# EAGLE board Programmer v0.1 (EAGLE 7.5.0)
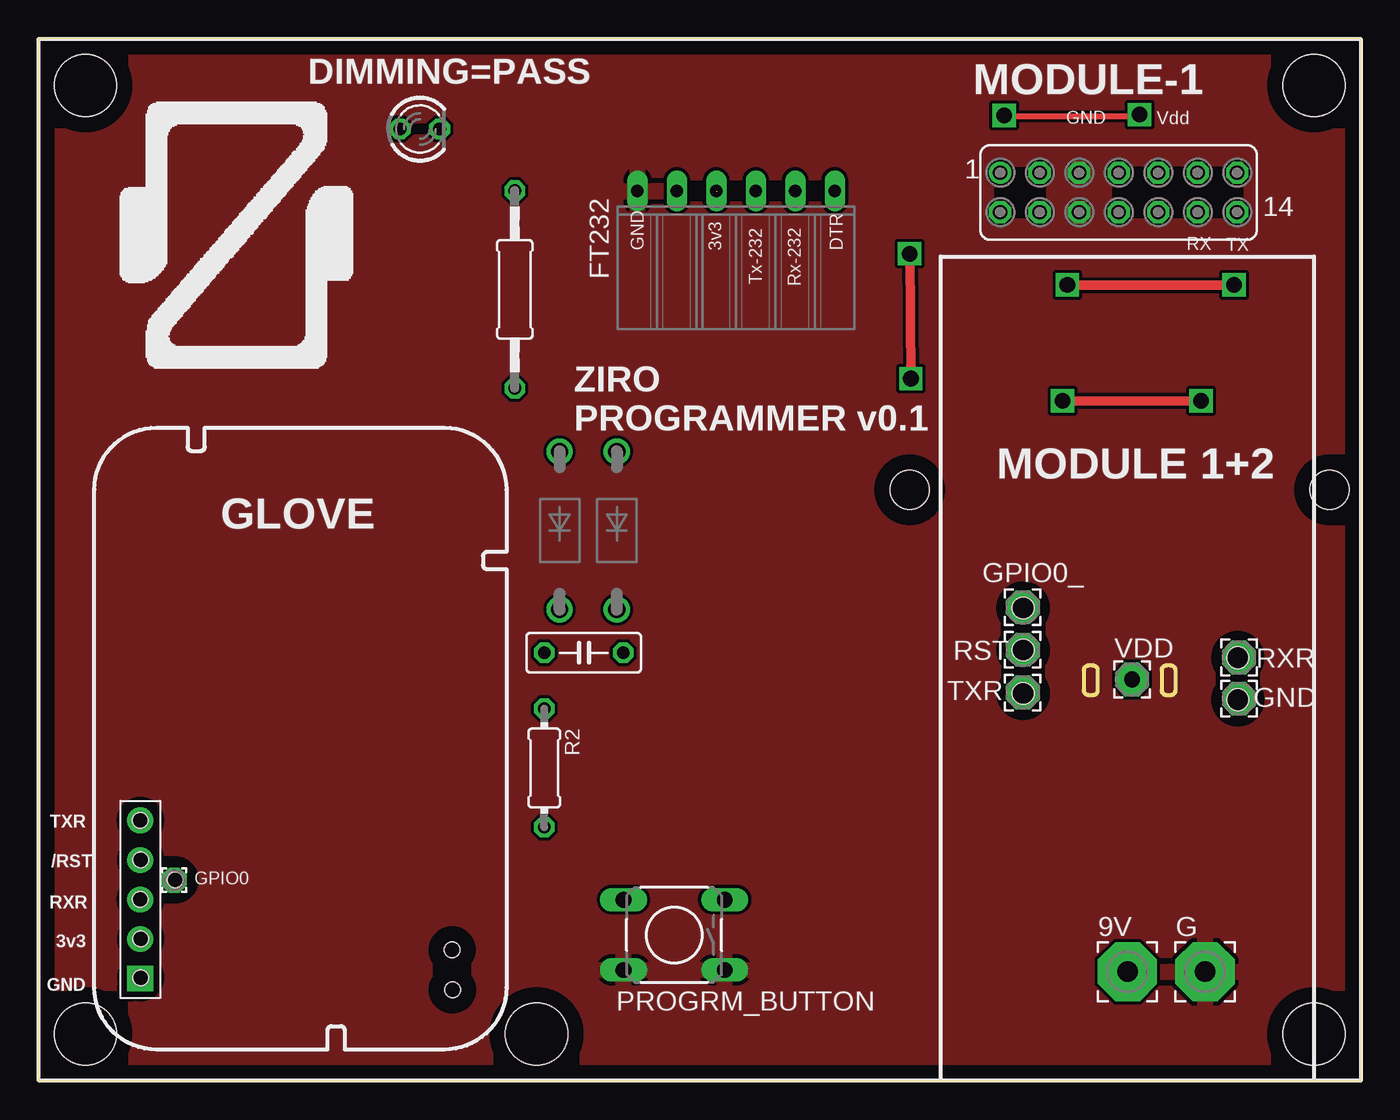
[diagram p0: board, top side]
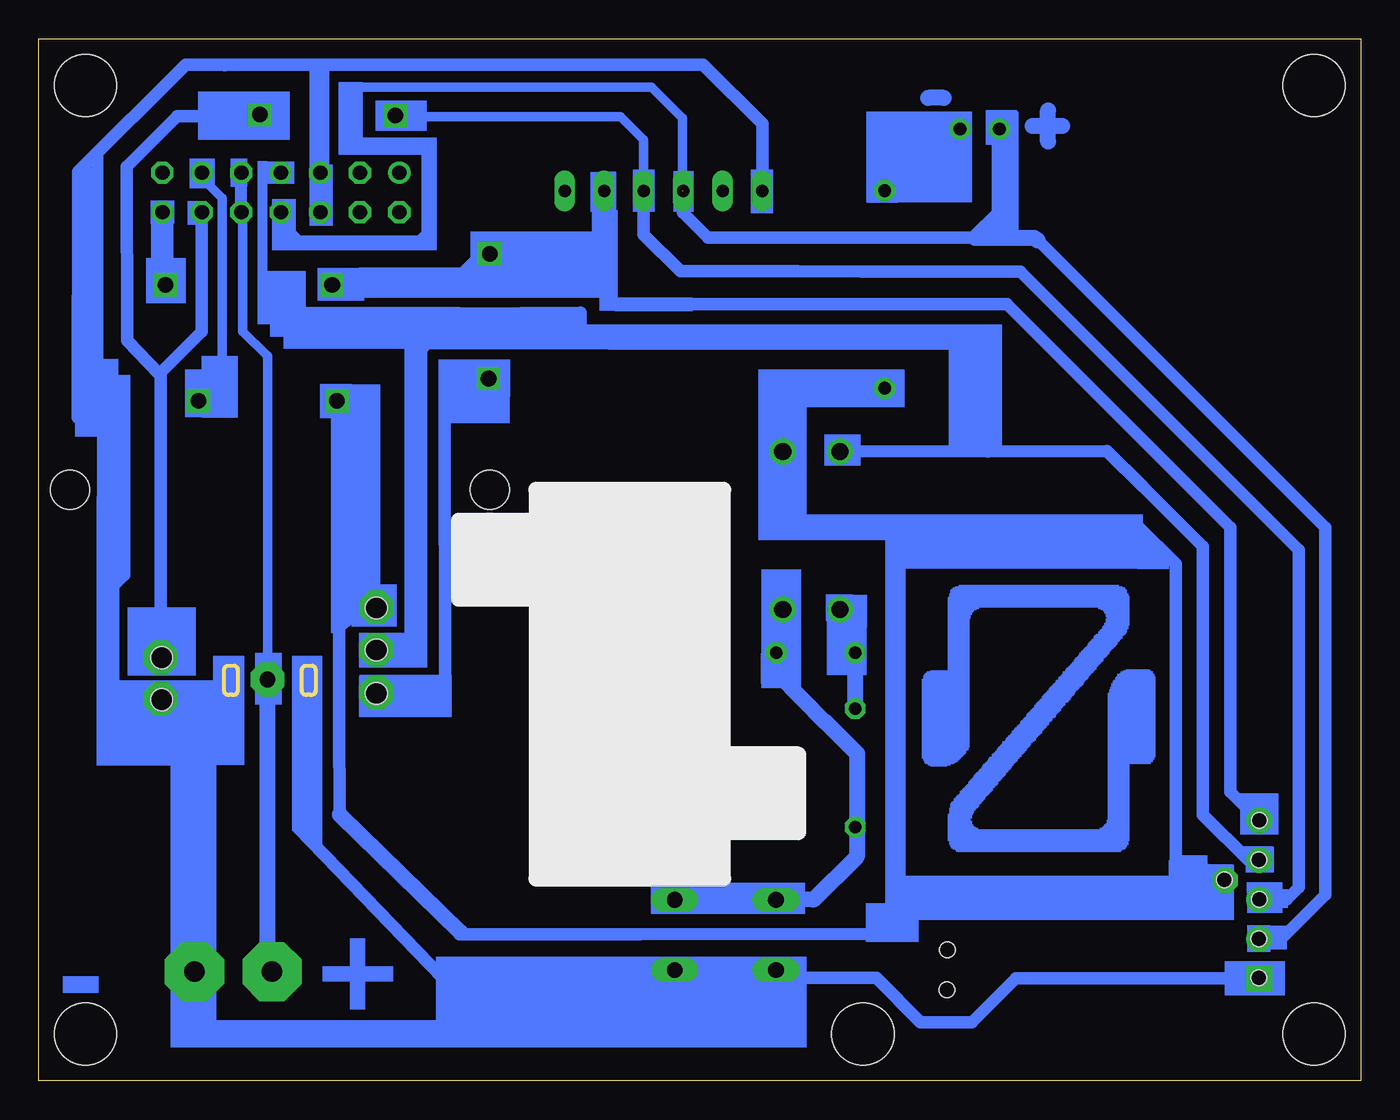
[diagram p1: board, bottom side, seen from below]

Size 85 x 67 mm. Coordinates in mm from the lower left corner, seen from the top.
Outline: 0,0 85,0 85,67 0,67 0,0
Copper layers (1*16): Top 0.035mm / dielectric 1.5mm / Bottom 0.035mm
Design rules "default": minimum track width 10mil, minimum drill 24mil, track to track 8mil, track to pad 8mil, pad to pad 8mil, via to via 8mil, smd to smd 8mil, copper to edge 40mil, drill to drill 8mil, minimum pad ring 10mil, minimum via ring 8mil, stop-mask expansion 4mil, vias tented up to drill 0mil, thermal gap 10mil
Holes 4 mm at 3,64 82,3 3,3 82,64 32,3
Holes 1 mm at 8.76,12.91 6.56,14.21 6.53,11.66 6.55,9.12 6.53,16.74 6.55,6.6 26.57,8.41 26.59,5.84
Holes 2.5 mm at 56,38 83,38
Holes 1.4 mm at 77.1,27.2 77.1,24.5 63.3,24.9 63.3,27.7 63.3,30.4
Milling: area 67.2,24.8 to 68.1,26.7; area 72.2,24.8 to 73.1,26.7

## Footprints (pad centres in the part's own frame; a part is rotated, then mirrored left to right if it is on the bottom)
3,81/1,3 = drill 1.321 pad 3.81 octagon: 1 0,0
C050-025X075 = drill 0.813 octagon: 1 -2.54,0; 2 2.54,0
DO41-10 = drill 1.118: A 5.08,0; C -5.08,0
FE06W = drill 0.813 long: 1 -6.35,0; 2 -3.81,0; 3 -1.27,0; 4 1.27,0; 5 3.81,0; 6 6.35,0
H5-2.54 = drill 0.889 pad 1.651 square: 1 0,5.08 | drill 0.889 pad 1.651: 2 0,2.54; 3 0,0; 4 0,-2.54; 5 0,-5.08
2,15/1,0 = drill 1.016 pad 2.159 octagon: 1 0,0
1,6/0,8 = drill 0.813 pad 1.6 octagon: 1 0,0
LED3MM = drill 0.813 octagon: A -1.27,0; K 1.27,0
TAC-SWITCH-PTH = drill 1.016 pad 1.524 long: 1 -3.251,2.261; 2 3.251,2.261; 3 -3.251,-2.261; 4 3.251,-2.261
0207/12 = drill 0.813 octagon: 1 -6.35,0; 2 6.35,0
0204/7 = drill 0.813 octagon: 1 -3.81,0; 2 3.81,0
FE07-2 = drill 0.914: 1 -7.62,1.27 | drill 0.914 octagon: 2 -7.62,-1.27; 3 -5.08,1.27; 4 -5.08,-1.27; 5 -2.54,1.27; 6 -2.54,-1.27; 7 0,1.27; 8 0,-1.27; 9 2.54,1.27; 10 2.54,-1.27; 11 5.08,1.27; 12 5.08,-1.27; 13 7.62,1.27; 14 7.62,-1.27

## Placement (x,y rotation side)
9V  WIREPAD3,81/1,3  [3,81/1,3]  70,7 0 top
C1  0.1uF  [C050-025X075]  35.04,27.52 0 top
D1  1N4004  [DO41-10]  33.49,35.38 90 top
D2  1N4004  [DO41-10]  37.17,35.38 90 top
FT232  [FE06W]  44.84,57.22 180 top
G  WIREPAD3,81/1,3  [3,81/1,3]  75,7 0 top
GL  5p-2.54  [H5-2.54]  6.52,11.65 180 top
GND  [2,15/1,0]  77.18,24.56 0 top
GPIO0  WIREPAD1,6/0,8  [1,6/0,8]  8.7,12.89 0 top
GPIO0_  [2,15/1,0]  63.28,30.44 0 top
LED1  TLLG4400  [LED3MM]  24.5,61.2 0 top
PROGRM_BUTTON  TACTILE-SWITCH-PTH  [TAC-SWITCH-PTH]  40.85,9.38 180 top
R1  [0207/12]  30.6,50.89 90 top
R2  [0204/7]  32.5,20.11 270 top
RST  [2,15/1,0]  63.28,27.7 0 top
RXR  [2,15/1,0]  77.18,27.22 0 top
SV2  [FE07-2]  69.44,57.12 0 top
TXR  [2,15/1,0]  63.28,24.96 0 top
VDD  [2,15/1,0]  70.3,25.8 0 top

## Library data of the parts
9V G GND GPIO0 GPIO0_ RST RXR TXR VDD = wirepad
C1 R1 = rcl
D1 D2 = diode
FT232 SV2 = con-lsta; OC_FARNELL: unknown; OC_NEWARK: unknown
GL = Seeed-OPL-Connector; MPN: F185-1105A0BSYA1
LED1 = led; MF: VISHAY SEMICONDUCTOR; OC_FARNELL: 1612435
PROGRM_BUTTON = GeekAmmo
R2 = eagle-ltspice; SPICEMODEL: NONE; SPICEPREFIX: R

## Nets
3.3V: FT232.4 GL.2 LED1.A SV2.8
/RST: D1.A GL.4 RST.1 SV2.7
CTS: FT232.5
DTR: FT232.1
GND: FT232.6 G.1 GL.1 GND.1 PROGRM_BUTTON.1 PROGRM_BUTTON.2 SV2.5 SV2.6
GPIO0: D2.A GPIO0.1 GPIO0_.1 R1.1 SV2.11
N$2: LED1.K R1.2
N$3: C1.2 D2.C PROGRM_BUTTON.3 PROGRM_BUTTON.4 R2.2
N$7: C1.1 D1.C R2.1
RXR: FT232.3 GL.3 RXR.1 SV2.12
TXR: FT232.2 GL.5 SV2.14 TXR.1
VDD: 9V.1 SV2.9 SV2.10 VDD.1

## Tracks (layer width: path | path; a pad name or v marks a point on that pad's centre or on a via)
3.3V  (1 unrouted)
  Bottom 0.61: SV2.8 69.44,55.24 68,53.8 60.8,53.8 59.95,54.65 59.95,59.55 60.6,60.2 64.7,60.2 65.4,60.9 65.4,63 64.5,63.9 45.6,63.9 43.6,61.9 43.6,57.2 43.2,56.8
  Bottom 0.813: GL.2 5.09,9.11 2.26,11.94 2.26,35.58 20.76,54.04 20.94,54.2 41.96,54.2 43.59,55.83 43.59,57.2 FT232.4
  Bottom 1.016: LED1.A 23.23,55.77 24.8,54.2 21,54.2 20.76,54.04
/RST
  Bottom 0.406: 33.8,40.46 D1.A 33.46,40.89 | 63.38,27.71 RST.1 | SV2.7 69.94,58.49 70.7,57.75 70.67,51.9 68.78,50.07 68.17,49.47 68.2,48.8 67.6,48.2 59.06,48.28 61.04,46.05
  Bottom 0.61: 61.04,46.05 60.36,47.06
  Bottom 0.813: GL.4 7.2,14.18 10.16,17.1 10.16,34.36 14,38.2 16.31,40.49 | 60.77,46.41 60.61,46.05 | 60.61,46.05 60.61,34.7 60.78,34.06 60.6,32.52 60.6,29.11 62,27.71 63.38,27.71 | 60.36,47.06 60.42,47.07 57.93,49.33 50.17,49.38 50.2,47.71 44.17,47.72 26.18,47.67 23.97,45.49 23.98,40.47 16.31,40.49 | 16.31,40.49 D1.A | 61.04,46.05 60.61,46.05
GND
  Bottom 0.406: SV2.6 SV2.5
  Bottom 0.813: GL.1 22.17,6.58 24.99,3.76 28.3,3.76 31.13,6.6 36.15,6.6 38,7.15 PROGRM_BUTTON.2 PROGRM_BUTTON.1 40.98,7.21 42.1,7 41.8,7 44.1,4.7 57.34,4.7 | 57.34,4.7 57.29,4.81 68.3,16.21 | 72.75,20.71 72.75,24.35 77.18,24.35 | 77.18,24.35 79.07,24.34 80.42,24.36 80.47,24.35 80.47,31.56 79.5,32.53 79.5,42.6 82.5,42.64 82.47,58.46 75.57,65.33 73.04,65.33 | 77.18,24.35 GND.1 72.65,24.56 | SV2.5 66.9,62.59 66.94,65.33 73.04,65.33 | 73.04,65.33 73.04,65.31 71.91,65.33 42.28,65.33 38.48,61.53 FT232.6 | 57.34,4.7 57.55,4.45 59.46,2.54 73.33,2.59 75.01,4.27 G.1
  Bottom 1.016: G.1 75.07,21.73 GND.1
  pour Top: -6,70 93,70 93,-5 -6,-5
GPIO0  (via drill 1)
  Top 0.61: v74.74,43.72 v65.83,43.72
  Bottom 0.406: 37.17,40.31 D2.A | 63.38,30.3 GPIO0_.1
  Bottom 0.61: 64.29,30.3 63.38,30.3 | 74.52,58.09 73.2,56.77 73.2,46.38 74.6,44.96 74.6,44.28 v74.74,43.72
  Bottom 0.813: GPIO0.1 10.69,12.89 11.89,14.09 11.89,33.23 14.28,35.56 30.2,35.56 30.19,35.61 | 37.17,40.31 37.23,35.56 29.67,35.58 30.44,35.58 30.19,35.61 | 57.91,9.54 57.9,9.54 57.94,9.4 46.37,9.4 31.4,9.43 30.19,10.64 30.19,35.61 | 65.65,17.1 65.68,23.16 65.68,29.16 64.29,30.3 | SV2.11 74.52,58.09 | v65.83,43.72 65.83,30.98 64.48,30.2 63.52,30.2 GPIO0_.1 | R1.1 30.59,44.35 35.27,44.47 37.17,42.56 D2.A
  Bottom 1.016: 65.65,17.1 57.91,9.54
N$2
  Bottom 1.016: R1.2 30.6,59 28.4,61.2 LED1.K
N$3
  Bottom 0.61: C1.2 36.78,29.91 D2.C | 37.5,11.65 43.94,11.64
  Bottom 0.813: PROGRM_BUTTON.4 43.94,11.64 PROGRM_BUTTON.3
  Bottom 1.016: C1.2 37.48,26.15 34.44,23.06 34.44,23.09 32.38,21.03 32.38,17.02 32.39,16.51 | 32.39,16.51 32.4,14.4 35.19,11.64 37.5,11.65 | 37.59,11.64 PROGRM_BUTTON.4 | R2.2 32.5,16.39 32.39,16.51
N$4
  Bottom 1.016: 19.2,61.4 21.1,61.4
N$5
  Bottom 1.016: 20.1,60.4 20.1,62.4
N$6
  Bottom 1.016: 26.8,63.2 27.8,63.2
N$7
  Bottom 0.406: D1.C 33.44,30.3
  Bottom 0.61: C1.1 33.1,29.91 D1.C
  Bottom 1.016: R2.1 32.5,23.9 C1.1
RXR  (via drill 1)
  Top 0.406: v70.79,62.13 70.79,62 61.87,62.02 62.01,62 v62.08,62.08
  Bottom 0.406: 77.25,45.44 77.18,45.53 | v70.79,62.13 70.59,61.96 70.76,62.03
  Bottom 0.61: v62.08,62.08 62.4,62 47.6,62 46.1,60.5 FT232.3
  Bottom 0.813: GL.3 4.75,11.65 3.98,12.42 3.98,34.14 21.89,52.05 32.11,52.05 36.22,52.07 43.75,52.07 46.1,54.42 FT232.3 | SV2.12 74.52,48.16 77.18,45.53 RXR.1 | 70.76,62.03 76.11,62.01 79.35,58.79 79.32,47.58 77.25,45.44
TXR  (via drill 1)
  Top 0.406: v56,53.18 56.03,53.18 | v76.86,51.17 v76.86,51.18
  Top 0.61: 56.03,53.18 v56.08,45.15 | v66.14,51.17 v76.86,51.17
  Bottom 0.406: 63.38,25.32 TXR.1 | 76.81,51.07 76.6,51.17 v76.86,51.18 | v66.14,51.17 65.56,51.4 65.99,51.2
  Bottom 0.61: SV2.14 76.86,55.85 76.83,52.09 76.81,51.07
  Bottom 0.813: GL.5 6.56,16.73 8.38,18.56 8.38,35.58 22.74,49.94 28.95,49.94 48.13,49.93 48.68,53 | 63.38,25.32 60.34,25.24 58.88,25.23 58.9,43.65 57.35,45.19 56.41,45.19 56.23,45.2 v56.08,45.15 | FT232.2 48.68,53 | 56.31,53.38 48.72,53.38 48.68,53.34 48.68,53 | 56.31,53.38 56.33,53.38 | 56.33,53.38 56.35,53.35 58.56,51.13 64.65,51.19 64.84,51.28 64.8,51.03 65.21,51.21 65.99,51.2 | v56,53.18 56.33,53.38 | 56.33,53.38 56.16,53.23 56.31,53.38
VDD
  Bottom 0.406: 71.88,55.75 SV2.10 SV2.9
  Bottom 0.61: 71.88,55.75 71.88,48.18 70.34,46.65 70.3,46.61 VDD.1 | 9V.1 70.3,7.3
  Bottom 1.016: 70.3,7.3 VDD.1
(copper drawn outside any net)
  shapes: Bottom area x670

## Text on the board
Bottom: + | -
tNames: DIMMING=PASS | MODULE-1 | GND | Vdd | GND | 3v3 | DTR | RX | TX | Tx-232 | Rx-232 | ZIRO / PROGRAMMER v0.1 | MODULE 1+2 | GLOVE | TXR | /RST | RXR | 3v3 | GND